# EAGLE board driver LF (EAGLE 7.1.0)
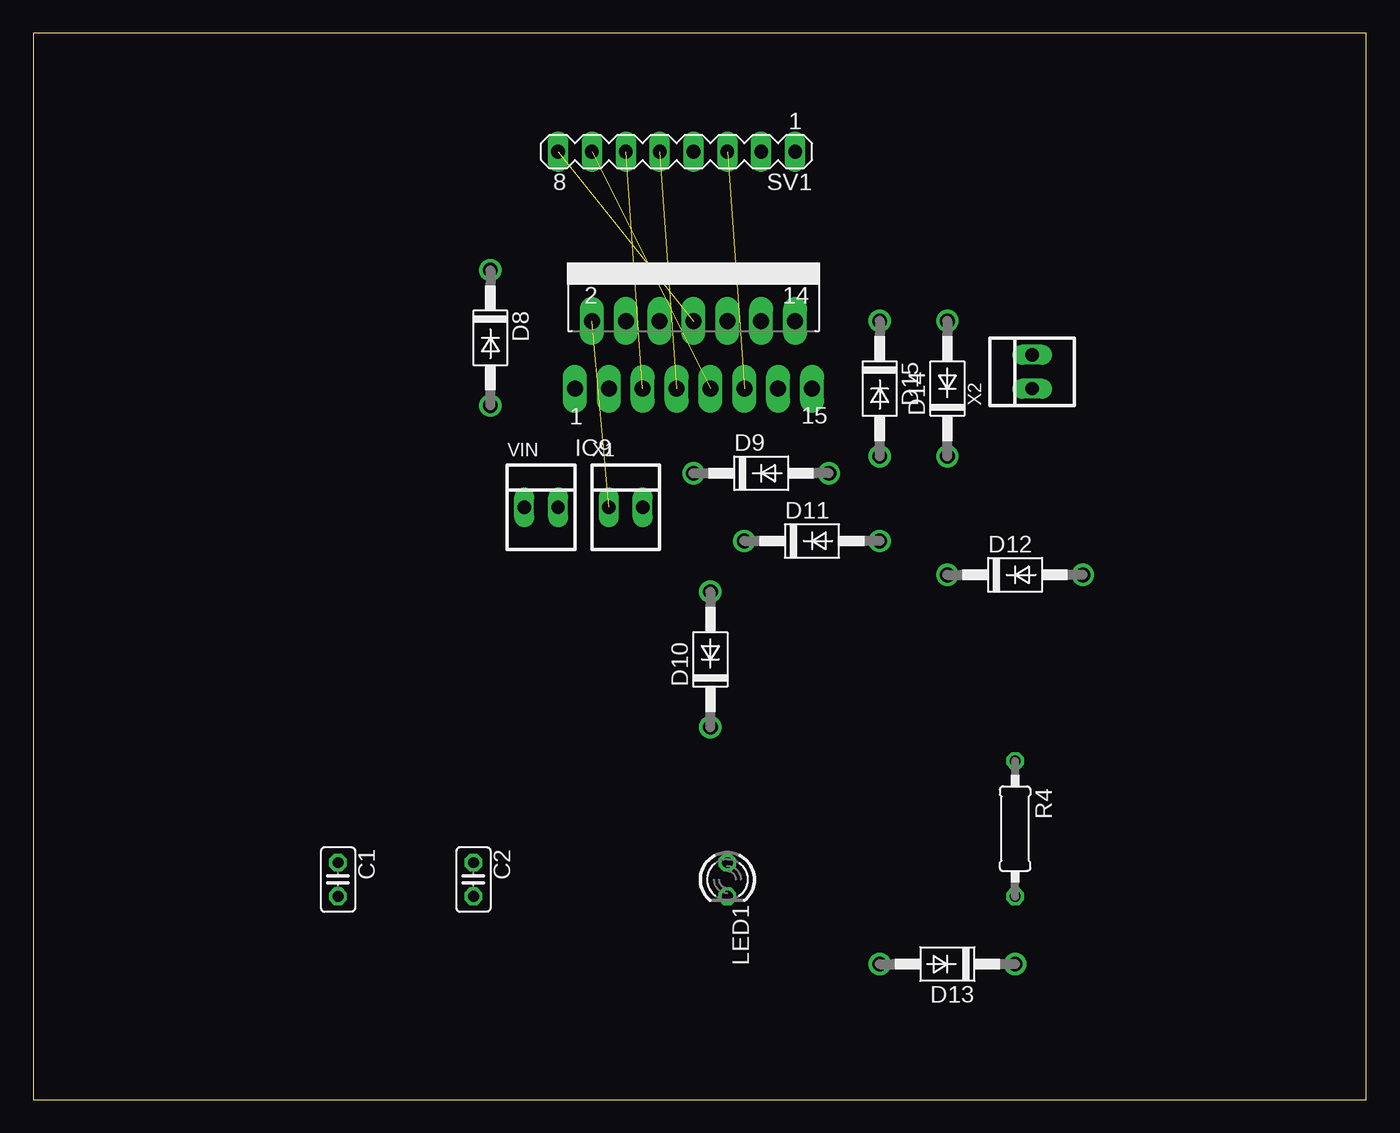
[diagram p0: board, top side]
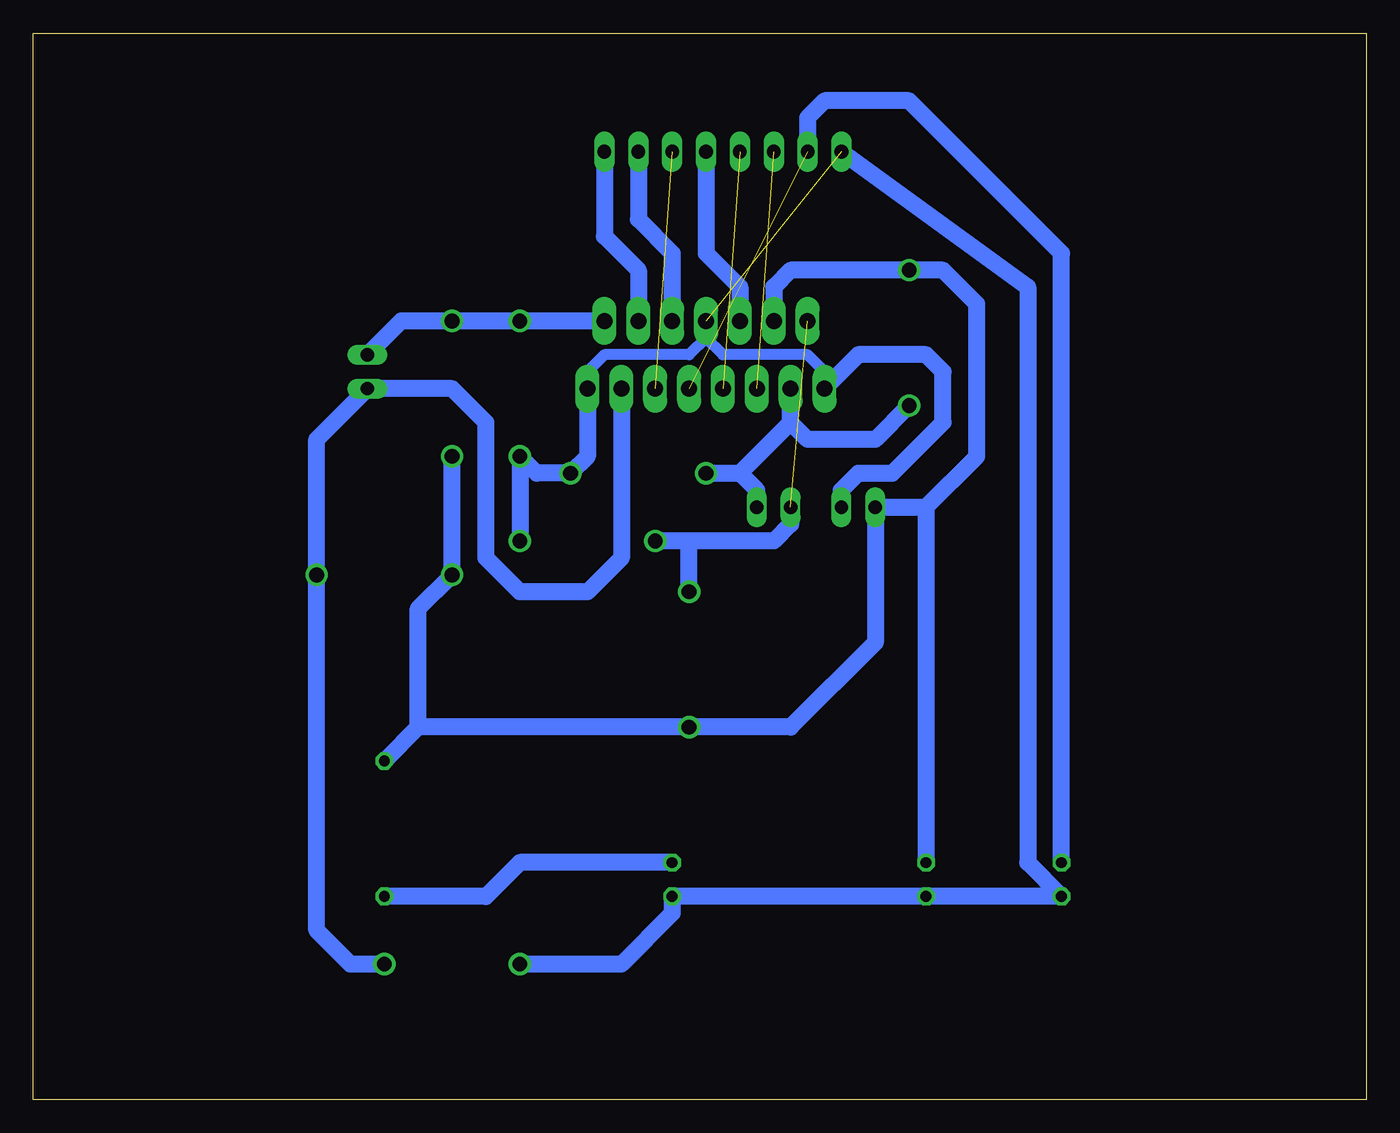
[diagram p1: board, bottom side, seen from below]

Size 100 x 80 mm. Coordinates in mm from the lower left corner, seen from the top.
Outline: 0,0 100,0 100,80 0,80 0,0
Copper layers (1*16): Top 0.035mm / dielectric 1.5mm / Bottom 0.035mm
Design rules "default": minimum track width 10mil, minimum drill 24mil, track to track 8mil, track to pad 8mil, pad to pad 8mil, via to via 8mil, smd to smd 8mil, copper to edge 40mil, drill to drill 8mil, minimum pad ring 10mil, minimum via ring 8mil, stop-mask expansion 4mil, vias tented up to drill 0mil, thermal gap 10mil

## Footprints (pad centres in the part's own frame; a part is rotated, then mirrored left to right if it is on the bottom)
C025-025X050 = drill 0.813 octagon: 1 -1.27,0; 2 1.27,0
DO41-10 = drill 1.118: A 5.08,0; C -5.08,0
MULTIWATT-15 = drill 1.2 long: 1 -8.89,-7.62; 2 -7.62,-2.54; 3 -6.35,-7.62; 4 -5.08,-2.54; 5 -3.81,-7.62; 6 -2.54,-2.54; 7 -1.27,-7.62; 8 0,-2.54; 9 1.27,-7.62; 10 2.54,-2.54; 11 3.81,-7.62; 12 5.08,-2.54; 13 6.35,-7.62; 14 7.62,-2.54; 15 8.89,-7.62
LED3MM = drill 0.813 octagon: A -1.27,0; K 1.27,0
0207/10 = drill 0.813 octagon: 1 -5.08,0; 2 5.08,0
MA08-1 = drill 1.016 long: 1 -8.89,0; 2 -6.35,0; 3 -3.81,0; 4 -1.27,0; 5 1.27,0; 6 3.81,0; 7 6.35,0; 8 8.89,0
22-23-2021 = drill 1 long: 1 -1.27,0; 2 1.27,0

## Placement (x,y rotation side)
C1  100nF  [C025-025X050]  22.86,16.51 270 top
C2  100nF  [C025-025X050]  33.02,16.51 270 top
D8  1N4004  [DO41-10]  34.29,57.15 270 top
D9  1N4004  [DO41-10]  54.61,46.99 0 top
D10  1N4004  [DO41-10]  50.8,33.02 90 top
D11  1N4004  [DO41-10]  58.42,41.91 0 top
D12  1N4004  [DO41-10]  73.66,39.37 0 top
D13  1N4004  [DO41-10]  68.58,10.16 180 top
D14  1N4004  [DO41-10]  68.58,53.34 90 top
D15  1N4004  [DO41-10]  63.5,53.34 270 top
IC9  L298  [MULTIWATT-15]  49.53,60.96 0 top
LED1  [LED3MM]  52.07,16.51 270 top
R4  330  [0207/10]  73.66,20.32 270 top
SV1  [MA08-1]  48.26,71.12 180 top
VIN  22-23-2021  [22-23-2021]  38.1,44.45 0 top
X1  22-23-2021  [22-23-2021]  44.45,44.45 0 top
X2  22-23-2021  [22-23-2021]  74.93,54.61 90 top

## Library data of the parts
C1 C2 R4 = rcl
D8-D15 = diode
IC9 = st-microelectronics
LED1 = led
SV1 = con-lstb; OC_FARNELL: unknown; OC_NEWARK: unknown
VIN X1 X2 = con-molex; MF: MOLEX; MPN: 22-23-2021; OC_FARNELL: 1462926; OC_NEWARK: 25C3832

## Nets
GND: C1.2 C2.2 D9.A D11.A D13.A D15.A IC9.1 IC9.8 IC9.15 LED1.K SV1.8 VIN.2
N$1: IC9.5 SV1.6
N$3: IC9.7 SV1.5
N$5: IC9.12 SV1.1
N$8: IC9.10 SV1.2
N$16: IC9.6 SV1.4
N$17: IC9.11 SV1.3
N$44: LED1.A R4.2
N$204: D8.A D9.C IC9.3 X1.2
N$205: D10.A D11.C IC9.2 X1.1
N$206: D12.A D13.C IC9.13 X2.1
N$207: D14.A D15.C IC9.14 X2.2
VCC: C1.1 IC9.9 SV1.7
VDD: C2.1 D8.C D10.C D12.C D14.C IC9.4 R4.1 VIN.1

## Tracks (layer width: path | path; a pad name or v marks a point on that pad's centre or on a via)
GND  (1 unrouted)
  Bottom 0.813: IC9.1 40.64,54.61 41.91,55.88 48.26,55.88 49.53,57.15 | IC9.8 49.53,57.15 | 49.53,57.15 50.8,55.88 57.15,55.88 58.42,54.61 IC9.15
  Bottom 1.27: SV1.8 25.4,60.96 25.4,17.78 C1.2 C2.2 LED1.K 52.07,13.97 55.88,10.16 D13.A | VIN.2 39.37,45.72 38.1,46.99 35.56,46.99 31.75,50.8 31.75,54.61 33.02,55.88 38.1,55.88 IC9.1 | IC9.15 58.42,48.26 D9.A 62.23,46.99 D15.A D11.A
N$1  (1 unrouted)
N$3  (1 unrouted)
N$5
  Bottom 1.27: SV1.1 57.15,64.77 54.61,62.23 IC9.12
N$8
  Bottom 1.27: SV1.2 54.61,66.04 52.07,63.5 IC9.10
N$16
  Bottom 1.27: SV1.4 49.53,63.5 46.99,60.96 IC9.6
N$17  (1 unrouted)
N$44
  Bottom 1.27: LED1.A 63.5,17.78 66.04,15.24 R4.2
N$204
  Bottom 1.27: D8.A 36.83,49.53 41.91,49.53 43.18,50.8 | 43.18,50.8 IC9.3 | D9.C 46.99,46.99 | 46.99,46.99 43.18,50.8 | X1.2 45.72,45.72 46.99,46.99
N$205  (1 unrouted)
  Bottom 1.27: X1.1 43.18,43.18 44.45,41.91 50.8,41.91 | 50.8,41.91 D11.C | D10.A 50.8,41.91
N$206
  Bottom 1.27: D13.C 76.2,10.16 78.74,12.7 D12.A 78.74,49.53 X2.1 68.58,53.34 66.04,50.8 66.04,40.64 63.5,38.1 58.42,38.1 55.88,40.64 IC9.13
N$207
  Bottom 1.27: IC9.14 D15.C D14.A 72.39,58.42 X2.2
VCC  (1 unrouted)
  Bottom 1.27: C1.1 22.86,63.5 34.29,74.93 40.64,74.93 41.91,73.66 SV1.7
VDD
  Bottom 1.27: 33.02,44.45 29.21,48.26 29.21,59.69 31.75,62.23 D8.C 43.18,62.23 44.45,60.96 IC9.4 | 33.02,44.45 VIN.1 36.83,34.29 43.18,27.94 D10.C 71.12,27.94 | 33.02,44.45 C2.1 | 71.12,27.94 R4.1 | 71.12,27.94 71.12,36.83 D12.C D14.C